# Altium PCB PCB robot V3.2.PCBDOC (part 1 of 3)
Units mil, origin at the board's own origin, x right, y up, seen from the top; angles counter-clockwise.
Board outline 11800 x 7870 mil, 2 copper layers (Top Layer, Bottom Layer); 128 components, 117 nets, 529 pads, 283 vias.
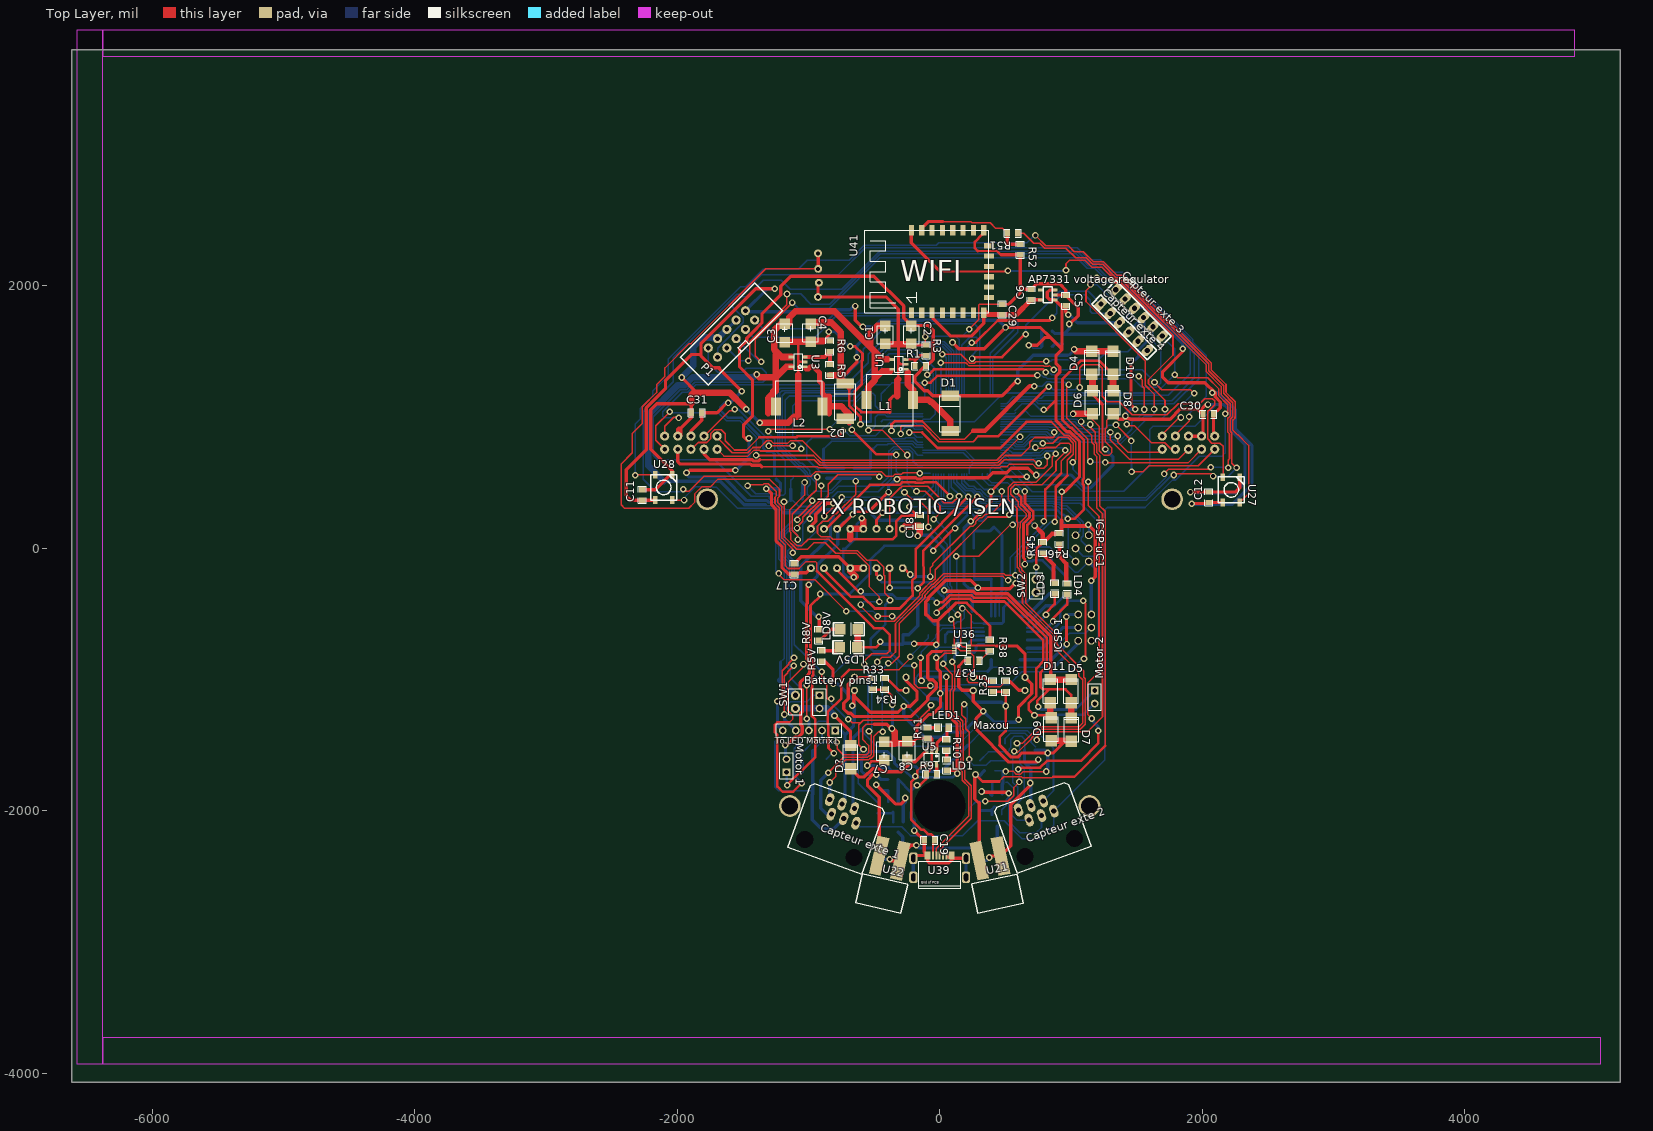
[diagram p0: Top Layer view]
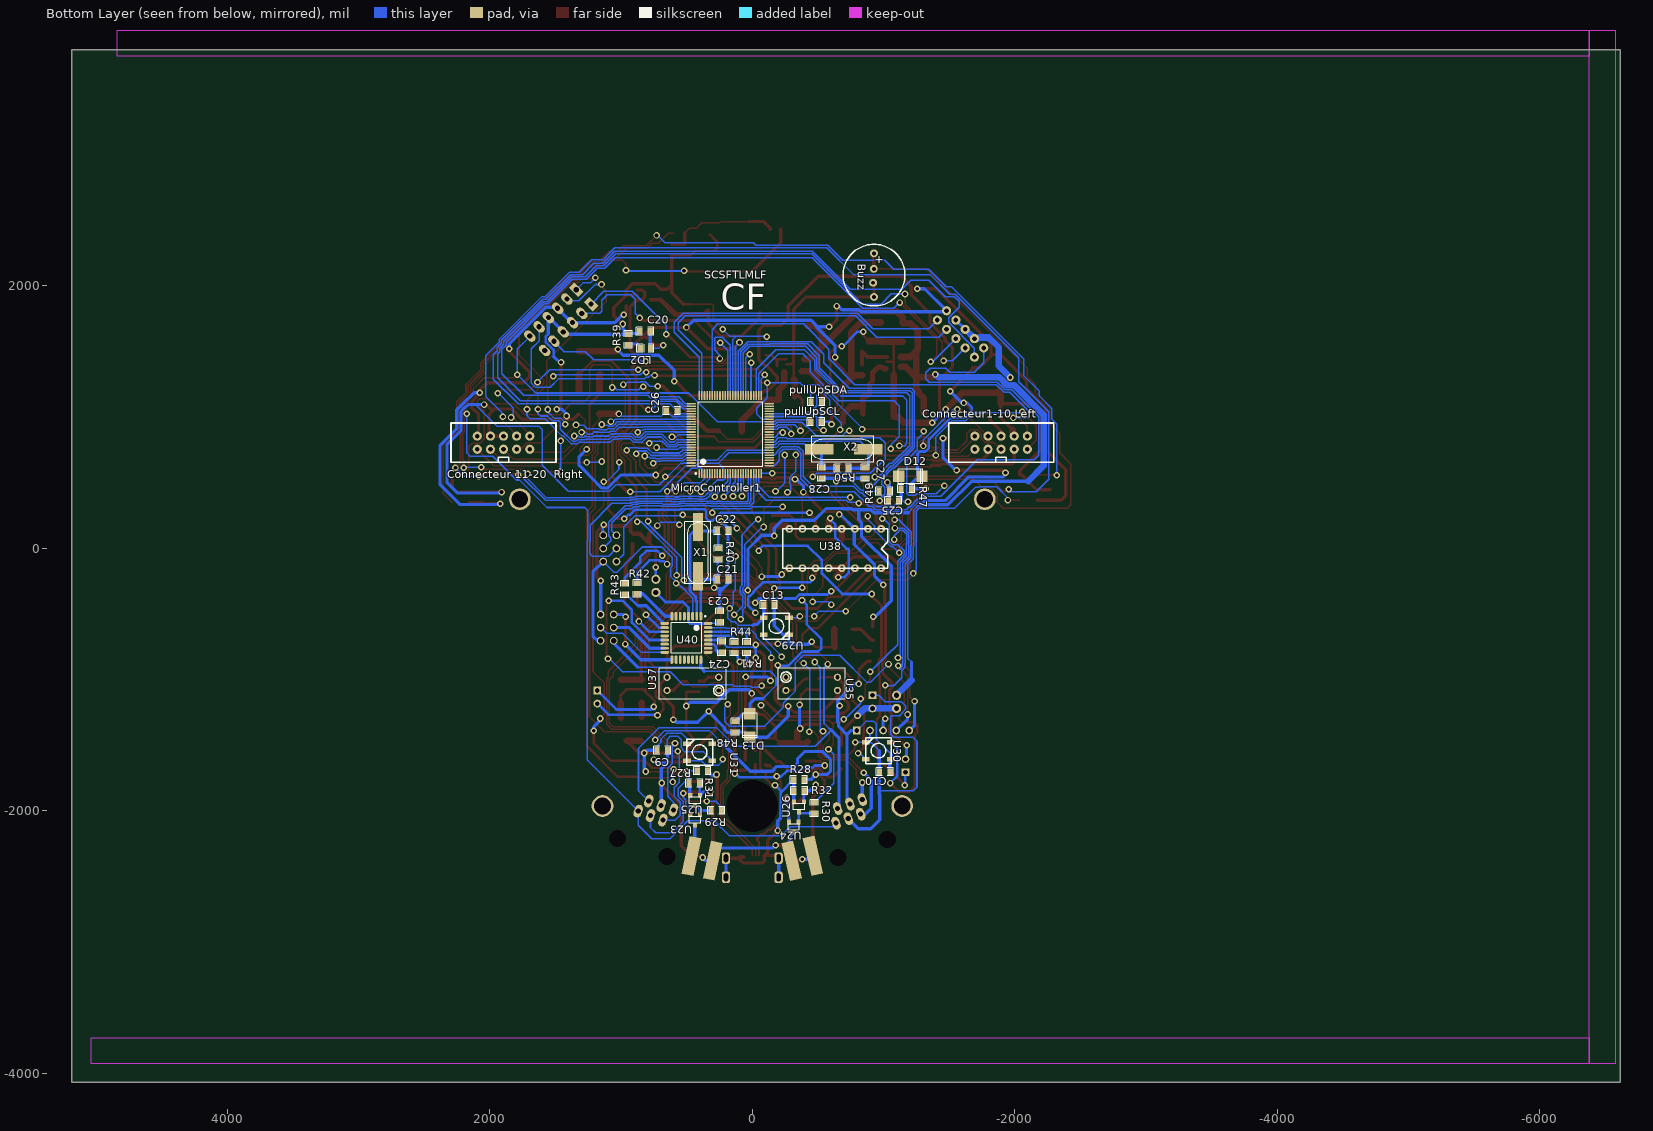
[diagram p1: Bottom Layer view, seen from below]

## Layer stack, top to bottom
Top Solder: solder mask 0.4, Solder Resist, Dk 3.5
Top Layer: signal copper 1.4
Dielectric1: dielectric 12.6, FR-4, Dk 4.8
Bottom Layer: signal copper 1.4
Bottom Solder: solder mask 0.4, Solder Resist, Dk 3.5

## Board outline
-6614.06,-4070.98 5185.94,-4070.98 5185.94,3799.02 -6614.06,3799.02

## Design rules (kind name [scope] priority, off if disabled: settings)
Clearance Clearance_bottom_polygon [OnLayer('Bottom Layer') Or OnLayer('Multi-Layer') vs OnLayer('Bottom Layer')  And  InPoly] p1: gap=20
Clearance Clearance_top_polygon [OnLayer('Top Layer')  Or OnLayer('Multi-Layer') vs OnLayer('Top Layer') And InPoly] p2: gap=20
Clearance Clearance_bottom [OnLayer('Bottom Layer') Or OnLayer('Multi-Layer') vs OnLayer('Bottom Layer')  And Not InPoly] p3: gap=7.48
Clearance Clearance_top [OnLayer('Top Layer')  Or OnLayer('Multi-Layer') vs OnLayer('Top Layer') And Not InPoly] p4: gap=7.56
Clearance Clearance_pad_to_pad [OnLayer('Multi-Layer') vs OnLayer('Multi-Layer')] p5: gap=10
ComponentClearance ComponentClearance_bottom [OnLayer('Bottom Overlay') vs OnLayer('Bottom Overlay')] p1: gap=0 collisioncheckmode=3 verticalgap=10 showdistances=FALSE
ComponentClearance ComponentClearance_top [OnLayer('Top Overlay') vs OnLayer('Top Overlay')] p2: gap=0 collisioncheckmode=3 verticalgap=10 showdistances=FALSE
DiffPairsRouting [All] p1: maxlimit=10 minlimit=3.94 mostfreqgap=10 toplayer_minwidth=15 toplayer_maxwidth=15 toplayer_prefwidth=15 bottomlayer_minwidth=15 bottomlayer_maxwidth=15 bottomlayer_prefwidth=15 maxuncoupledlength=500
FabricationTestPointUsage TestPointUsage [All] p1: valid=0 allowmultiple=FALSE
FabricationTestpoint Testpoint [All] p1: side=3 testpointundercomponent=TRUE minsize=40 maxsize=100 preferedsize=60 minholesize=0 maxholesize=40 preferedholesize=32 testpointgrid=1 allowsidetop=TRUE allowsidebottom=TRUE usegrid=TRUE gridtolerance=0.01
HoleSize [All] p1: absolutevalues=TRUE maxlimit=1000 minlimit=16 maxpercent=80.000 minpercent=20.000
MinimumAnnularRing [PadXSize_AllLayers = PadYSize_AllLayers] p1: minimumring=8
PermittedLayers [All] p1: toplayerpermitted=TRUE bottomlayerpermitted=TRUE
PolygonConnect [All] p1: connectstyle=Relief reliefconductorwidth=24 reliefentries=4 polygonreliefangle="90 Angle" airgapwidth=10
RoutingVias [All] p1: holewidth=16 width=32 viastyle="Through Hole" minholewidth=15.75 minwidth=31.5 maxholewidth=23.62 maxwidth=393.7
SMDToPlane [All] p1: distance=0
SolderMaskExpansion [All] p1: expansion=4
ViasUnderSMD [All] p1: allowed=FALSE
Width Width_botom_top [OnLayer('Bottom Layer') or OnLayer('Top Layer')] p1: maxlimit=10000 minlimit=10 preferedwidth=32 minimp=50.000000 maximp=50.000000 favimp=50.000000
24 further rules are at their usual default settings.

## Classes and differential pairs
component class "Wi fi connector": C29 R51 R52 U41
component class CarteTxMoteur: C17 C18 D4 D5 D6 D7 D8 D9 D10 D11 "Motor 1" "Motor 2" R33 R34 R35 R36 R37 R38 U35 U36 U37 U38
component class "Schema chargeur USB projet robot": C7 C8 LD1 LED1 R9 R10 R11 U5
component class "Alim sch projet robot": "AP7331 voltage regulator" "Battery pins1" C1 C2 C3 C4 C5 C6 D1 D2 D? L1 L2 LD5V LD8V R1 R3 R5 R5V R6 R8V "REG 5V" "REG 8V" SW1 U1 U3
component class "CarteTxCapteurDistance 2": Analog C9 C10 C11 C12 C13 Digital infrared1 infrared2 infrared3 infrared4 infrared5 infrared6 "Infrared 1" LedRgbWs2812b1 LedRgbWs2812b2 LedRgbWs2812b3 LedRgbWs2812b4 LedRgbWs2812b5 LedRgbWs2812b6 LedRgbWs2812b7 LedRgbWs2812b8 LedRgbWs2812b9 LedRgbWs2812b10 Q1 Q2 Q3 Q4 Q5 Q6 Q7 Q8 Q9 Q10 Q11 R27 R28 R29 R30 R31 R32 U21 U22 U23 U24 U25 U26 U27 U28 U29 U30 U31
component class "IA Core": C19 C20 C21 C22 C23 C24 C25 C26 C27 C28 D12 D13 "ICSP 1" "ICSP uC1" LD2 LD3 LD4 MicroController1 pullUpSCL pullUpSDA R39 R40 R41 R42 R43 R44 R45 R46 R47 R48 R49 R50 SW2 U39 U40 X1 X2
component class "LED Matrix connector": "To LED Matrix1"
component class "Sound Connector": Buzz
component class TXRobot-Boutons: ButtonCo1 P1
component class "Line driver connector": C30 C31 Connecteur1-10 "Connecteur1-10 Left" "Connecteur 11-20  Right"
component class "MKbloc Connector": "Capteur exte 1" "Capteur exte 2" "Capteur exte 3" "Capteur exte 4" RJ12-2

## Components (designator, comment, footprint, x,y, rotation, side; value= is the part's Value field where it differs from the comment)
"AP7331 voltage regulator" "AP7331" AP7331 822.85,1930.96 r90 top
"Battery pins1" "Header 2" HDR1X2 -915.57,-1120.49 r270 top
Buzz "BuzzerChinois" BuzzerChinois -927.22,2082.09 r270 bottom
C1 "CAP_POL" 293D/B -414.49,1697.32 r270 top
C2 "CAP_POL" 293D/B -215.69,1697.62 r270 top
C3 "CAP_POL" 293D/B -1180.41,1709.86 r270 top
C4 "CAP_POL" 293D/B -984.25,1712.6 r270 top
C5 "CAP" 0805 960.59,1847.97 r90 top
C6 "CAP" 0805 698.31,1973.76 r270 top
C7 "CAP_POL" 293D/B -421.57,-1614.27 r90 top
C8 "CAP_POL" 293D/B -246.52,-1611.71 r90 top
C9 "CAP" 0805 646.95,-1539.17 r0 bottom
C10 "CAP" 0805 -1048.52,-1703.03 r0 bottom
C11 "CAP" 0805 -2266.54,366.93 r90 top
C12 "CAP" 0805 2050.39,348.62 r90 top
C13 "CAP" 0805 -86.5,-430.18 r180 bottom
C17 "CAP" 0805 -1108.27,-117.62 r270 top
C18 "CAP" 0805 -150.79,170.08 r90 top
C19 "CAP" 0805 -118.11,-2224.41 r0 top
C20 "CAP" 0805 777.99,1655.63 r0 bottom
C21 "CAP" 0805 264.54,-235.55 r180 bottom
C22 "CAP" 0805 264.54,132.33 r180 bottom
C23 "CAP" 0805 247.24,-479.93 r270 bottom
C24 "CAP" 0805 232.87,-711.84 r270 bottom
C25 "CAP" 0805 -1115.59,364.15 r0 bottom
C26 "CAP" 0805 573.22,1048.08 r0 bottom
C27 "CAP" 0805 -862,614.35 r270 bottom
C28 "CAP" 0805 -527.69,614.35 r270 bottom
C29 "CAP" 0805 476.68,1781.06 r90 top
C30 "CAP" 0805 2086.08,1020.43 r180 top
C31 "CAP" 0805 -1812.59,1033.48 r180 top
"Capteur exte 1" "RJ12_1" RJ12_Femelle_FCI -840.6,-2286.64 r340 top
"Capteur exte 2" "RJ12_FCI_Femelle" RJ12_Femelle_FCI 837.82,-2280.29 r20 top
"Capteur exte 3" "headers6" Headers6 1518.86,1794.15 r45 top
"Capteur exte 4" "headers6" Headers6 1405.57,1684.59 r45 top
"Connecteur1-10 Left" "comment" HE10-10V -1696.06,755.12 r90 bottom locked
"Connecteur 11-20  Right" "comment" HE10-10V 2096.06,755.12 r90 bottom locked
D1 "SS32" "Schottly Diode SS32 footprint" 79,1162.38 r0 top
D2 "SS32" "Schottly Diode SS32 footprint" -719.69,1255.63 r0 top
D4 "DiodeRedresseuse" "Diode MULTICOMP SS16" 1160.24,1414.57 r90 top
D5 "DiodeRedresseuse" "Diode MULTICOMP SS16" 1001.57,-1088.78 r90 top
D6 "DiodeRedresseuse" "Diode MULTICOMP SS16" 1164.57,1112.99 r90 top
D7 "DiodeRedresseuse" "Diode MULTICOMP SS16" 1004.13,-1381.5 r90 top
D8 "DiodeRedresseuse" "Diode MULTICOMP SS16" 1322.05,1112.99 r90 top
D9 "DiodeRedresseuse" "Diode MULTICOMP SS16" 850,-1378.54 r90 top
D10 "DiodeRedresseuse" "Diode MULTICOMP SS16" 1320.67,1413.98 r90 top
D11 "DiodeRedresseuse" "Diode MULTICOMP SS16" 844.09,-1088.78 r90 top
D12 "DiodeRedresseuse" "Diode MULTICOMP SS16" -1205.12,549.04 r180 bottom
D13 "DiodeRedresseuse" "Diode MULTICOMP SS16" 18.15,-1350.62 r270 bottom
D? "DiodeRedresseuse" "Diode MULTICOMP SS16" -679.41,-1591.57 r90 top
"ICSP 1" "ISCP Arduino" "Prog Arduino" 1055.96,-504.18 r0 top
"ICSP uC1" "ISCP Arduino" "Prog Arduino" 1035.71,99.17 r0 top
L1 "IND" 1050 -557.19,1130.98 r90 top
L2 "IND" 1050 -1247.97,1081.87 r90 top
LD1 "comment" LED0805 54.13,-1611.75 r270 top
LD2 "Yellow" LED0805 854.72,1526.18 r180 bottom
LD3 "Yellow" LED0805 876.2,-346.37 r90 top
LD4 "Yellow" LED0805 970.83,-350.4 r90 top
LD5V "comment" LED1206 -628.27,-753.94 r180 top
LD8V "comment" LED1206 -624.07,-615.81 r180 top
LED1 "comment" LED0805 -14.53,-1365.92 r0 top
MicroController1 "ATmega2560-16AU" 100A_N 167.53,867 r90 bottom
"Motor 1" "Header 2" HDR1X2 -1167.32,-1706.69 r90 top
"Motor 2" "Header 2" HDR1X2 1181.14,-1083.23 r270 top
P1 "comment" HE10-10V -1692.91,1456.69 r135 top
pullUpSCL "RES" 0805 -525.26,965.59 r0 bottom
pullUpSDA "RES" 0805 -527.91,1116.59 r0 bottom
R1 "RES" 0805 -188.31,1389.8 r0 top
R3 "RES" 0805 -102.52,1550.24 r270 top
R5 "RES" 0805 -836.95,1400.18 r270 top
R5V "RES" 0805 -900.35,-779.74 r270 top
R6 "RES" 0805 -838.92,1579.9 r270 top
R8V "RES" 0805 -921.54,-700.43 r90 top
R9 "RES" 0805 -23.39,-1720.27 r180 top
R10 "RES" 0805 51.91,-1538.67 r90 top
R11 "RES" 0805 -94.26,-1368.13 r270 top
R27 "RES" 0805 340.47,-1695.65 r0 bottom
R28 "RES" 0805 -395.21,-1762.43 r0 bottom
R29 "RES" 0805 234.88,-1998.01 r0 bottom
R30 "RES" 0805 -472.09,-1939.98 r270 bottom
R31 "RES" 0805 482.98,-1789.48 r180 bottom
R32 "RES" 0805 -316.52,-1848.45 r180 bottom
R33 "RES" 0805 -508.07,-1073.03 r90 top
R34 "RES" 0805 -417.66,-1072.46 r90 top
R35 "RES" 0805 404.96,-1093.11 r90 top
R36 "RES" 0805 503.29,-1093.11 r90 top
R37 "RES" 0805 299.45,-855.06 r180 top
R38 "RES" 0805 383.39,-699.65 r270 top
R39 "RES" 0805 944.68,1551.38 r90 bottom
R40 "RES" 0805 259.66,-80.85 r90 bottom
R41 "RES" 0805 43.3,-714.94 r270 bottom
R42 "RES" 0805 876.2,-346.37 r90 bottom
R43 "RES" 0805 970.83,-350.4 r90 bottom
R44 "RES" 0805 138.88,-795.02 r90 bottom
R45 "RES" 0805 785.45,-36.52 r90 top
R46 "RES" 0805 912.22,33.39 r90 top
R47 "RES" 0805 -1134.15,452.67 r180 bottom
R48 "RES" 0805 128.67,-1320.46 r270 bottom
R49 "RES" 0805 -965.22,435.32 r180 bottom
R50 "RES" 0805 -650.21,609.35 r180 bottom
R51 "RES" 0805 595.24,2402.29 r180 top
R52 "RES" 0805 614.21,2316.93 r270 top
SW1 "allumage" JMP2-100 -1099.49,-1219.94 r90 top
SW2 "allumage" JMP2-100 735.04,-336.02 r90 top
"To LED Matrix1" "Header 5" HDR1X5 -796.69,-1388.15 r180 top
U1 "LM2731" "LM2731 footprint" -258.01,1365.33 r270 top
U3 "LM2731" "LM2731 footprint" -1025.33,1383.25 r270 top
U5 "MCP73831" MCP73831 -23.2,-1537.91 r180 top
U21 "infrared" Infrared 382.68,-2362.2 r192 top
U22 "infrared" Infrared -380.75,-2362.2 r167 top
U23 "Transistors" BC817-40 436,-2070.85 r180 bottom
U24 "Transistors" BC817-40 -316.03,-2125.5 r180 bottom
U25 "Transistors" BC817-40 435.6,-1922.06 r180 bottom
U26 "Transistors" BC817-40 -356.12,-1970.45 r180 bottom
U27 "LedRgbWs2812b" LedRgbWs2812b 2222.44,445.47 r90 top
U28 "LedRgbWs2812b" LedRgbWs2812b -2103.35,464.17 r90 top
U29 "LedRgbWs2812b" LedRgbWs2812b -183.35,-593.37 r180 bottom
U30 "LedRgbWs2812b" LedRgbWs2812b -961.48,-1541.93 r0 bottom
U31 "LedRgbWs2812b" LedRgbWs2812b 401,-1553.6 r0 bottom
U35 "ITR9608" "ITR9608 footprint" -452.76,-1032.68 r180 bottom locked
U36 "MCP6002" MCP6002 109.45,-740.55 r0 top
U37 "ITR9608" "ITR9608 footprint" 452.76,-1032.68 r0 bottom locked
U38 "L293NE" L293NE -981.89,-151.38 r270 bottom
U39 "USB microB" "USB micro B connector" 0,-2471.73 r0 top
U40 "ATmega16U2-AU" 32A_N 502.28,-682.86 r270 bottom
U41 "ESP8266MOD" "ESP8266MOD Footprint" -215.02,1794.49 r90 top
X1 "16MHz" HC-49S-SMD 413.75,-211.8 r90 bottom
X2 "16MHz" HC-49S-SMD -510.75,754.25 r180 bottom

## Footprints (in the part's own frame and the unit in brackets; to place one, negate y for a bottom-side part, rotate by r counter-clockwise, add the part's x,y. Pads: shape width x height; smd on the part's side, far side on the other; paste and mask are expansions set on the pad)
32A_N [mm] "Thin QFP, 32-Leads, Body 7x7mm, Pitch 0.8mm, IPC Medium Density"
  oval 1.65x0.55 smd: 1(-4.2,2.8) 2(-4.2,2) 3(-4.2,1.2) 4(-4.2,0.4) 5(-4.2,-0.4) 6(-4.2,-1.2) 7(-4.2,-2) 8(-4.2,-2.8) 17(4.2,-2.8) 18(4.2,-2) 19(4.2,-1.2) 20(4.2,-0.4) 21(4.2,0.4) 22(4.2,1.2) 23(4.2,2) 24(4.2,2.8)
  oval 0.55x1.65 smd: 9(-2.8,-4.2) 10(-2,-4.2) 11(-1.2,-4.2) 12(-0.4,-4.2) 13(0.4,-4.2) 14(1.2,-4.2) 15(2,-4.2) 16(2.8,-4.2) 25(2.8,4.2) 26(2,4.2) 27(1.2,4.2) 28(0.4,4.2) 29(-0.4,4.2) 30(-1.2,4.2) 31(-2,4.2) 32(-2.8,4.2)
  silkscreen extent -4.32,-2.95 2.95,3.75, body extent -3.5,-3.5 3.5,3.5, height 1.2
100A_N [mm] "Thin QFP, 100-Leads, Body 14x14mm, Pitch 0.5mm, IPC Medium Density"
  oval 1.8x0.3 smd: 1(-7.55,6) 2(-7.55,5.5) 3(-7.55,5) 4(-7.55,4.5) 5(-7.55,4) 6(-7.55,3.5) 7(-7.55,3) 8(-7.55,2.5) 9(-7.55,2) 10(-7.55,1.5) 11(-7.55,1) 12(-7.55,0.5) 13(-7.55,0) 14(-7.55,-0.5) 15(-7.55,-1) 16(-7.55,-1.5) 17(-7.55,-2) 18(-7.55,-2.5) 19(-7.55,-3) 20(-7.55,-3.5) 21(-7.55,-4) 22(-7.55,-4.5) 23(-7.55,-5) 24(-7.55,-5.5) 25(-7.55,-6) 51(7.55,-6) 52(7.55,-5.5) 53(7.55,-5) 54(7.55,-4.5) 55(7.55,-4) 56(7.55,-3.5) 57(7.55,-3) 58(7.55,-2.5) 59(7.55,-2) 60(7.55,-1.5) 61(7.55,-1) 62(7.55,-0.5) 63(7.55,0) 64(7.55,0.5) 65(7.55,1) 66(7.55,1.5) 67(7.55,2) 68(7.55,2.5) 69(7.55,3) 70(7.55,3.5) 71(7.55,4) 72(7.55,4.5) 73(7.55,5) 74(7.55,5.5) 75(7.55,6)
  oval 0.3x1.8 smd: 26(-6,-7.55) 27(-5.5,-7.55) 28(-5,-7.55) 29(-4.5,-7.55) 30(-4,-7.55) 31(-3.5,-7.55) 32(-3,-7.55) 33(-2.5,-7.55) 34(-2,-7.55) 35(-1.5,-7.55) 36(-1,-7.55) 37(-0.5,-7.55) 38(0,-7.55) 39(0.5,-7.55) 40(1,-7.55) 41(1.5,-7.55) 42(2,-7.55) 43(2.5,-7.55) 44(3,-7.55) 45(3.5,-7.55) 46(4,-7.55) 47(4.5,-7.55) 48(5,-7.55) 49(5.5,-7.55) 50(6,-7.55) 76(6,7.55) 77(5.5,7.55) 78(5,7.55) 79(4.5,7.55) 80(4,7.55) 81(3.5,7.55) 82(3,7.55) 83(2.5,7.55) 84(2,7.55) 85(1.5,7.55) 86(1,7.55) 87(0.5,7.55) 88(0,7.55) 89(-0.5,7.55) 90(-1,7.55) 91(-1.5,7.55) 92(-2,7.55) 93(-2.5,7.55) 94(-3,7.55) 95(-3.5,7.55) 96(-4,7.55) 97(-4.5,7.55) 98(-5,7.55) 99(-5.5,7.55) 100(-6,7.55)
  silkscreen extent -7.67,-6.25 6.25,6.83, body extent -7,-7 7,7, height 1.2
293D/B [mil]
  rect 80x80 smd: 1(0,0) 2(140,0)
  silkscreen extent 0,-60 140,60
0805 [mil]
  rect 40x50 smd: 1(0,0) 2(80,0)
  silkscreen extent -25,-30 105,30
1050 [mm]
  rect 3.5x2 smd paste+0 mask+1: 1(0,0) 2(0,-9)
  silkscreen extent -5,-9 5,0
AP7331 [mm]
  rect 0.6x1.1 smd: 1(-0.95,-1.35) 2(0,-1.35) 3(0.95,-1.35) 4(0.95,1.35) 5(-0.95,1.35)
  silkscreen extent -1.55,-0.85 1.55,0.85
BC817-40 [mm]
  rect 0.8x0.9 smd: 1(0.95,1) 2(-0.95,1) 3(0,-1)
  silkscreen extent -1.1,-0.6 1.1,0.6
BuzzerChinois [mil]
  round 60 hole 31.5: 0(-166.14,0)
  round 60 hole 30: 1(166.14,0)
  silkscreen extent -235,-235 235,235
"Diode MULTICOMP SS16" [mm]
  rect 2.2x2.21 smd: 1(-2.25,0) 2(2.25,0)
  silkscreen extent -2.37,-1.4 2.37,1.4
"ESP8266MOD Footprint" [mm]
  rect 2x1 smd paste+0 mask+0.05: 1(0,0) 2(0,-2) 3(0,-4) 4(0,-6) 5(0,-8) 6(0,-10) 7(0,-12) 8(0,-14) 15(16,-14) 16(16,-12) 17(16,-10) 18(16,-8) 19(16,-6) 20(16,-4) 21(16,-2) 22(16,0)
  rect 1x2 smd paste+0 mask+0.05: 9(3,-15) 10(5,-15) 11(7,-15) 12(9,-15) 13(11,-15) 14(13,-15)
  silkscreen extent 0,-15 16,9
HC-49S-SMD [mm] "SMD quartz crystal"
  rect 5.5x2 smd: 1(0,0) 2(9.5,0)
  silkscreen extent -1.5,-2.48 10.5,2.52
HDR1X2 [mm] "Connector; Header; 2 Position"
  rect 1.5x1.5 hole 0.9: 1(0,0)
  round 1.5 hole 0.9: 2(2.54,0)
  silkscreen extent -1.27,-1.27 3.81,1.27
HDR1X5 [mm] "Connector; Header; 5 Position"
  rect 1.5x1.5 hole 0.9: 1(0,0)
  round 1.5 hole 0.9: 2(2.54,0) 3(5.08,0) 4(7.62,0) 5(10.16,0)
  silkscreen extent -1.27,-1.27 11.43,1.27
HE10-10V [mil]
  round 70 hole 36: 1(0,0) 2(100,0) 3(0,-100) 4(100,-100) 5(0,-200) 6(100,-200) 7(0,-300) 8(100,-300) 9(0,-400) 10(100,-400)
  silkscreen extent -100,-600 200,200
Headers6 [mil]
  rect 99.37x60 hole 39.37: 1(0,250)
  oval 99.37x60 hole 39.37: 2(0,150) 3(0,50) 4(0,-50) 5(0,-150) 6(0,-250)
  silkscreen extent -50,-300 50,300
Infrared [mm]
  rect 2.3x7.5 smd far side: gndEmitter(-2.1,0) VCC(2.1,0)
  rect 2.3x7.5 smd: gndReceiver(2.1,0) VCC(-2.1,0)
  silkscreen extent -4.5,4.1 4.5,9.9
"ITR9608 footprint" [mm]
  round 1.4 hole 0.8 paste+0 mask+0.05: 1(-5,1.27) 2(-5,-1.27) 3(5,-1.27) 4(5,1.27)
  silkscreen extent -6.5,-3 6.5,3
JMP2-100 [mil]
  round 70 hole 40: 1(0,0) 2(100,0)
  silkscreen extent -50,-50 150,50
L293NE [mil]
  round 60 hole 30: 1(-300,0) 2(-300,-100) 3(-300,-200) 4(-300,-300) 5(-300,-400) 6(-300,-500) 7(-300,-600) 8(-300,-700) 9(0,0) 10(0,-100) 11(0,-200) 12(0,-300) 13(0,-400) 14(0,-500) 15(0,-600) 16(0,-700)
  silkscreen extent -300,-750 0,50
LED0805 [mil]
  rect 40x50 smd: A(80,0) K(0,0)
  silkscreen extent -25,-30 105,30
LED1206 [mil]
  rect 80x80 smd: A(135,0) K(0,0)
  silkscreen extent -50,-50 185,50
LedRgbWs2812b [mm]
  rect 1.5x0.9 smd: din(2.45,1.65) dout(-2.45,-1.65) GND(2.45,-1.65) VCC(-2.45,1.65)
  silkscreen extent -2.5,-2.5 2.5,2.5
"LM2731 footprint" [mm]
  rect 0.55x1 smd paste+0 mask+0.05: 1(0,0) 2(-0.95,0) 3(-1.9,0) 4(-1.9,-2.7) 5(0,-2.7)
  silkscreen extent -2.54,-2.16 0.64,-0.51
MCP6002 [mm]
  rect 0.75x0.3 smd paste+0 mask+0.05: 1(0,0) 2(0,-0.5) 3(0,-1) 4(0,-1.5) 5(2.9,-1.5) 6(2.9,-1) 7(2.9,-0.5) 8(2.9,0)
  silkscreen extent 0.4,-1.9 2.5,0.5
MCP73831 [mm]
  rect 0.6x1.1 smd paste+0 mask+0.05: 1(0,0) 2(0.95,0) 3(1.9,0) 4(1.9,2.8) 5(0,2.8)
  silkscreen extent -0.51,0.63 2.41,2.16
"Prog Arduino" [mm]
  round 1.5 hole 1 paste+0 mask+0.05: 1(0,0) 2(2.54,0) 3(0,-2.54) 4(2.54,-2.54) 5(0,-5.08) 6(2.54,-5.08)
RJ12_Femelle_FCI [mm]
  oval 1.524x2.524 hole 1: 1(-3.17,8.89) 2(-1.91,6.35) 3(-0.63,8.89) 4(0.63,6.35) 5(1.91,8.89) 6(3.17,6.35)
  round 0 hole 3.3: ""(-5.08,0) ""(5.08,0)
  silkscreen extent -7.62,-2.54 7.62,10.8
"Schottly Diode SS32 footprint" [mm]
  rect 3.39x1.96 smd paste+0 mask+0.05: 1(0,0) 2(0,-6.81)
  silkscreen extent -2,-7 2,0
"USB micro B connector" [mm]
  rect 0.4x1.5 smd paste+0 mask+0.05: 1(-1.3,3.302) 2(-0.65,3.302) 3(0,3.302) 4(0.65,3.302) 5(1.3,3.302)
  rrect50% 1.6x2.2 hole 0.8 slot 1.5 at 90 deg paste+0 mask+0.05: 6(-5.1,2.794) 7(-5.1,-0.906) 8(5.1,-0.906) 9(5.1,2.794)
  rect 1.15x1.5 smd paste+0 mask+0.05: 10(-2.325,3.302) 11(2.325,3.302)
  silkscreen extent -4.08,-3.05 4.04,2.16

## Part data
"Battery pins1" "Motor 1" "Motor 2": "Header, 2-Pin"
C1 C2 C3 C4 C7 C8: "capacité polarisée"
C5 C6 C9 C10 C11 C12 C13 C17 C18 C19 C20 C21 C22 C23 C24 C25 C26 C27 C28 C29 C30 C31: "capacité non polarisée"
"Capteur exte 1": library part RJ12_FCI_Femelle
"Connecteur1-10 Left" "Connecteur 11-20  Right" P1: library part HE10-10, "10-pin connector"
D1 D2: "Schottky Diode 20V 3A"
"ICSP 1" "ICSP uC1": "Programmation Port For Arduino"
L1 L2: library part "Shielded inductor", "Shielded Inductor 1050"
LD1 LD2 LD3 LD4 LD5V LD8V LED1: library part LED, "LED 5mm/3mm/CMS"
MicroController1: "8-bit AVR Microcontroller, 4.5-5.5V, 256KB Flash, 4KB EEPROM, 8KB SRAM, 86 GPIO pins, 100-pin TQFP, Industrial Grade (-40°C to 85°C), Pb-Free"
pullUpSCL pullUpSDA R1 R3 R5 R5V R6 R8V R9 R10 R11 R27 R28 R29 R30 R31 R32 R33 R34 R35 R36 R37 R38 R39 R40 R41 R42 R43 R44 R45 R46 R47 R48 R49 R50 R51 R52: "resistance"
SW1 SW2: library part JUMPER2, "cavalier 1 position"
"To LED Matrix1": "Header, 5-Pin"
U1 U3: "Boost switch regulator DCDC"
U5: "Voltage regulator for Li-po or li-ion battery, USB compatible"
U21 U22: library part RPR-359F
U23 U24 U25 U26: "NPN transistor"
U35 U37: "Intersection sensor"
U36: "Double Operational Amplifier"
U39: "Usb female connector SMD micro B"
U40: "8-bit AVR Microcontroller, 2.7-5.5V, 16KB Flash, 512 Bytes EEPROM, 512 Bytes SRAM, 32-pin TQFP, Industrial Grade (-40°C to 85°C)"
U41: "Wi fi ESP"
X1 X2: library part XTAL, "Quartz"

## Free pads (board coordinates)
  round 60 hole 30: 0(-925.79,2130.04) 1(-920.83,2023.82)
  round 165.35 hole 125.98: ""(-1771.65,374.02) ""(-1141.73,-1963.78) ""(1141.73,-1963.78) ""(1771.65,374.02)
  round 0 hole 393.7: ""(0,-1963.78)

## Via types
v1: diameter 50, hole 28, Top Layer to Bottom Layer, 283 vias

## Nets (pads, with @x,y where several pads share a name; then routed paths per layer and width w, separated by ;. In a path a pad name is that pad's centre, name@x,y a point inside that pad or via, vN(x,y) a via of type N, cw(c..) or ccw(c..) an arc to the next point about the centre after c; other vN are vias at no path point)
BATTERY: C1.1 C3.1 L1.1 L2.1 SW1.2 U1.4 U1.5 U3.4 U3.5 | length 6977.4
  Top Layer w50: v1(-1394.98,1325.04) -1373.07,1303.13 -1247.97,1303.13 ; -1307.3,1028.58 -1307.3,1144.76 -1267.6,1184.47 -1267.6,1196.06 -1247.97,1196.06 -1247.97,1303.13 ; U3.5@-1131.63,1383.25 -1167.85,1383.25 -1247.97,1303.13 ; U3.4@-1131.63,1458.05 -1204.07,1458.05 -1235.47,1489.45 ; L1.1@-545.94,1142.22 -545.94,1228.09 -494.43,1279.61 -494.43,1291.91 ; C1.1@-418.96,1695.85 -474.69,1695.85 -529.51,1641.02 -529.51,1534.47 -494.43,1499.39 ; -395.61,1440.14 -435.18,1440.14 -494.43,1499.39 ; -376.32,1350.77 -377.89,1349.19 -437.15,1349.19 -494.43,1291.91 ; -1247.97,1303.13 -1247.97,1476.95 -1235.47,1489.45 ; -1235.47,1489.45 -1262.34,1516.32 -1262.34,1659.23 -1206.24,1715.33 -1146.2,1715.33 -1146.2,1759.82 -1099.23,1806.79 -801.83,1806.79 -494.43,1499.39 ; -494.43,1291.91 -494.43,1499.39
  Bottom Layer w12: -1329.04,331.52 -1321.57,324.05 -1261.34,324.05 -1229.27,291.98 -1229.27,283.39 -1229.1,283.22 -1229.1,11.77 -1227.61,10.29 -1227.61,-79.43 -1183.6,-123.44 -1183.6,-837.07 -1213.43,-866.89
  Bottom Layer w25: -2102.89,511.44 -1671.02,511.44 -1491.1,331.52 -1329.04,331.52 ; -1213.43,-1006 -1213.43,-866.89
  Bottom Layer w50: -2102.89,511.44 -2220.16,628.7 -2220.16,1018.64 -1994.47,1244.33 -1941.91,1244.33 -1883.09,1303.15 -1416.89,1303.15 v1@-1399.98,1320.06 ; -1213.43,-1006 SW1.2@-1099.49,-1119.94
"BATTERY PIN +": "Battery pins1.2" D?.2 SW1.1 | length 601.2
  Top Layer w25: v1@-803.35,-1274.92 v1(-801.56,-1274.92) -679.41,-1397.07 D?.2@-679.41,-1502.99
  Bottom Layer w50: SW1.1@-1099.49,-1219.94 -916.12,-1219.94 -915.57,-1220.49 -855.98,-1220.49 v1(-801.56,-1274.92)
D+: R44.1 U39.3 | length 1736.2
  Top Layer w10: U39.3@0,-2341.73 0,-2297.35 241.39,-2055.96 241.39,-1810.62 190.92,-1760.14 190.92,-1692.44 178.42,-1679.94 178.42,-1381.48 175.86,-1378.92 175.86,-1319.1 102.64,-1245.88 102.64,-1088.85 116.16,-1075.32 116.16,-896.59 95.57,-876 v1(95.57,-864.21)
  Bottom Layer w20: v1(95.57,-864.21) 112.07,-847.72 112.07,-821.83 R44.1@138.88,-795.02
D-: R41.2 U39.2 | length 1706.1
  Top Layer w12: U39.2@-25.59,-2341.73 -25.59,-2287.55 157.3,-2104.65 157.3,-2104.04 222.83,-2038.51 222.83,-1818.31 172.36,-1767.83 172.36,-1700.13 159.86,-1687.63 159.86,-1389.16 157.3,-1386.61 157.3,-1326.79 81.42,-1250.9 81.42,-1083.82 96.16,-1069.08 96.16,-960.89 v1@26.61,-891.34
  Bottom Layer w25: v1(27.2,-880.14) v1@28.39,-881.32 ; 43.3,-852.56 R41.2@43.3,-794.94
DTR: C25.2 R49.2 U40.13 | length 5140.5
  Top Layer w12: v1(-1029.82,502.19) -1029.82,406.24 -1143.22,292.84 -1143.22,129.97 -1136.69,123.44 -1136.69,67.75 -1089.87,20.93 -1050.57,20.93 -1001.42,70.08 -844.96,70.08 -756.52,-18.36 -625.65,-18.36 -553.83,-90.18 -477.46,-90.18 -425.45,-142.19 -425.45,-202.66 -419.1,-209.01 -419.1,-282.93 -419.86,-283.69 -419.86,-338.22 -373.27,-384.82 v1@-373.27,-392.15 ; v1(-193.6,-890.39) -193.6,-1034.41 -165.31,-1062.7 -87.07,-1062.7 v1(-70.65,-1046.28) ; v1(1093.52,-400.67) 1111.28,-418.43 1111.28,-830.53 v1(1099.82,-841.99)
  Bottom Layer w12: v1@-378.84,-396.04 v1(-378.84,-394.57) ; v1@-68.64,-1059.65 6.6,-1059.65 14.08,-1052.17 137.81,-1052.17 149.06,-1040.93 526.48,-1040.93 625.76,-941.64 989.15,-941.64 1088.8,-841.99 v1(1099.82,-841.99)
  Bottom Layer w19.68: v1(-378.84,-394.57) -413.76,-429.49 -413.76,-578.62 -526.65,-691.52 -526.65,-761.69 -501.83,-786.52 -383.19,-786.52 -275.41,-894.29 v1@-189.7,-894.29
  Bottom Layer w20: U40.13@667.63,-698.61 785.11,-698.61 917.4,-566.32 917.4,-469.61 986.34,-400.67 v1(1093.52,-400.67)
  Bottom Layer w25: C25.2@-1046.5,377.48 R49.2@-1046.5,424.33 ; R49.2@-1045.22,435.32 -1045.22,486.79 v1(-1029.82,502.19)
"ENABLE 1": MicroController1.23 U38.1 | length 1252.6
  Top Layer w25: U38.1@-981.89,148.62 -981.89,169.09 -944.47,206.51 -944.47,259.7 -861.24,342.93 v1(-810.43,342.93)
  Bottom Layer w10: v1(-810.43,342.93) -802.93,350.43 -731.56,350.43 -716.63,365.36 -106.09,365.36 -29.32,442.14 MicroController1.23@-29.32,569.75
  Bottom Layer w20: v1@-810.43,335.24 v1(-810.43,342.93)
"ENABLE 2": MicroController1.5 U38.16 | length 1404
  Top Layer w12: v1(-73.17,-215.1) -73.17,-151.22 -54.17,-132.22 -54.17,-118.32 232.64,168.49 253.51,168.49 276.1,191.08 276.1,205.85 303.52,233.27 322.25,233.27 347.26,258.28 388.38,258.28 473.52,343.43 v1(473.52,433.43) ; v1@-71.16,-217.6 v1@-71.16,-215.1
  Top Layer w20: U38.16@-281.89,-151.38 -272.6,-151.38 v1(-224.43,-199.55)
  Bottom Layer w12: MicroController1.5@325.01,543.97 MicroController1.5@325.01,569.75 325.19,569.57 325.19,532.15 375.66,481.68 413.08,481.68 461.34,433.43 v1(473.52,433.43)
  Bottom Layer w20: v1@-222.3,-215.1 v1(-73.17,-215.1)
GND: "AP7331 voltage regulator.2" "Battery pins1.1" "Capteur exte 1.4" "Capteur exte 2.4" "Capteur exte 3.4" "Capteur exte 4.4" "Connecteur1-10 Left.8" "Connecteur 11-20  Right.4" "Connecteur 11-20  Right.6" "ICSP 1.6" "ICSP uC1.6" "To LED Matrix1.2" Buzz.1 C1.2 C2.2 C3.2 C4.2 C5.2 C6.1 C7.2 C8.2 C9.2 C10.2 C11.2 C12.2 C13.2 C17.1 C18.2 C19.1 C20.2 C21.2 C22.2 C23.1 C24.1 C26.2 C27.2 C28.2 C29.2 C30.2 C31.2 D6.1 D7.1 D8.1 D9.1 LD5V.K LD8V.K MicroController1.11 MicroController1.32 MicroController1.62 MicroController1.81 MicroController1.98 MicroController1.99 P1.4 P1.6 P1.8 pad.1 R3.1 R6.1 R9.2 R11.2 R27.2 R28.2 R31.1 R32.1 R33.1 R34.1 R35.1 R36.1 R38.1 R39.2 R49.1 R52.2 U1.2 U3.2 U5.2 U25.2 U26.2 U27.GND U28.GND U29.GND U30.GND U31.GND U36.4 U38.4 U38.5 U38.12 U38.13 U39.5 U39.6 U39.7 U39.8 U39.9 U39.10 U39.11 U40.3 U40.28 U41.15 | length 41494.7
  Top Layer w12: v1@-780.63,-1477.26 -780.63,-1528.44 -735.73,-1573.35 -558.03,-1573.35 -542.27,-1557.59 -542.27,-1502 -584.9,-1459.37 -584.9,-1363.19 -562.09,-1340.37 -500.37,-1340.37 ; -681.89,68.25 -815.47,68.25 -836.86,89.64 -907.18,89.64 -930.98,113.44 -930.98,167.58 -891.33,207.23 -852.97,207.23 -797.57,262.62 -787.39,262.62 -639.86,410.15 v1(-639.86,512.85) ; R3.1@-108.98,1556.99 v1(-108.98,1612.32) ; 4.23,-931.99 -23.46,-904.29 -23.46,-860.69 37.62,-799.61 U36.4@109.45,-799.61 ; v1@222.75,1669.22 296.85,1743.33 296.85,1854.65 303.27,1861.06 C29.2@476.68,1861.06 ; v1(502.8,-1700.45) 562.42,-1700.45 583.71,-1721.75 615.66,-1721.75 635.2,-1702.2 v1@799.09,-1702.2 ; D6.1@1164.57,1024.41 1164.57,980.97 1216.22,929.31 1216.22,743.46 1251.75,707.93 1289.47,707.93 1312.54,731 1312.54,763.66 1262.56,813.64 1262.56,910.46 1272.01,919.9 1272.01,974.37 D8.1@1322.05,1024.41
  Top Layer w16.06: 289.33,2266.36 437.18,2266.36
  Top Layer w20: -1079.27,1323.6 -1079.27,1433.64 ; -1079.27,1575.33 -1079.27,1433.64 ; U3.2@-1025.33,1420.65 -1066.28,1420.65 -1079.27,1433.64 ; -887.34,1579.9 -843.13,1624.11 ; -681.89,68.25 -360.67,68.25 -329.8,99.11 -329.8,206.4 -286.12,250.08 C18.2@-172.62,250.08 ; v1(-681.28,1539.9) -644.59,1539.9 -588.19,1483.5 -588.19,1433.87 -592.87,1429.18 -592.87,1252.29 -648.07,1197.1 -648.07,1088.77 -596.43,1037.13 -380.73,1037.13 ; LD5V.K@-628.27,-753.94 -485.08,-753.94 -442.93,-711.79 v1(-453.07,-711.79) ; R33.1@-503.17,-1079.41 -500.94,-1077.18 R34.1@-414.07,-1077.18 ; R34.1@-417.66,-1072.46 -368.05,-1122.07 -368.05,-1179.31 v1@-357.24,-1190.12 ; -315.49,1288.37 -315.49,1555.85 ; -312.34,1555.85 -312.34,1419.47 -295.61,1402.74 U1.2@-258.01,1402.74 ; v1@-228.46,305.93 C18.2@-172.62,250.08 ; C8.2@-214.14,-1486.8 -175.47,-1448.13 R11.2@-94.26,-1448.13 ; v1(-172.72,-1805.2) -150,-1805.2 -103.39,-1758.58 R9.2@-103.39,-1720.27 -60.6,-1677.49 U5.2@-60.6,-1537.91 ; C18.2@-150.79,250.08 C18.2@-172.62,250.08 ; 120.79,-418.8 124.13,-415.45 205.85,-415.45 383.39,-593 R38.1@383.39,-699.65 ; v1(237.54,207.05) 237.54,200.61 390.96,354.04 v1(390.96,432.68) 503.84,545.55 v1(663.19,545.55) ; 289.33,2266.36 268.6,2287.09 268.6,2335.28 U41.15@324.15,2390.83 ; R35.1@404.96,-1093.11 R36.1@503.29,-1093.11 503.29,-1392.48 456.89,-1438.88 456.89,-1501.36 ; 437.18,2266.36 466.61,2236.93 ; C29.2@476.68,1861.06 526.65,1861.06
  Top Layer w25: C11.2@-2266.54,446.93 -2165.81,446.93 -2052.11,560.63 U28.GND@-2038.39,560.63 -2038.39,590.85 -2203.11,755.57 -2203.11,1056.16 -2157.89,1101.38 -1892.59,1101.38 C31.2@-1892.59,1033.48 -1892.59,993.5 -1983.86,902.22 ; v1(-1965.77,1301.93) -1851.08,1187.24 ; C17.1@-1108.27,-117.62 -1054.63,-63.98 -769.29,-63.98 U38.12@-681.89,-151.38 ; pad.1@-912.4,2026.81 -927.22,2026.81 Buzz.1@-927.22,1915.94 -409.23,1915.94 -315.49,1822.2 -315.49,1555.85 ; -681.89,111.81 U38.4@-681.89,148.62 ; -500.37,-1340.37 -402.15,-1340.37 v1@-350.98,-1391.54 ; -380.73,1037.13 -380.73,1133.74 -353.48,1160.98 -322.58,1160.98 ; C2.2@-208.31,1550.24 R3.1@-102.52,1550.24 ; U39.6@-200.79,-2361.73 -180.79,-2341.73 U39.10@-91.54,-2341.73 ; v1(-195.47,-728.03) -34.68,-728.03 v1@-33.82,-727.17 ; v1@-189.33,-2154.98 -118.11,-2226.2 -118.11,-2315.16 U39.10@-91.54,-2341.73 ; -175.47,-1448.13 -175.47,-1357.16 -85.24,-1266.93 -55.12,-1266.93 6.97,-1204.84 6.97,-1014.13 3.64,-1010.8 3.64,-941.54 -18.86,-919.04 -18.86,-841.87 v1(-25.65,-835.08) ; -67.68,-1442.6 -60.6,-1449.68 U5.2@-60.6,-1537.91 ; v1(-26.52,-735.33) -13.25,-722.07 -13.25,-552.83 ; 63.58,-2353.7 66.73,-2353.7 70.12,-2350.31 U39.11@91.54,-2350.31 ; 120.79,-418.8 -13.25,-552.83 ; U39.9@200.79,-2361.73 102.95,-2361.73 U39.11@91.54,-2350.31 ; 456.89,-1501.36 546.06,-1590.53 548.11,-1590.53 548.6,-1591.02 595.3,-1591.02 626.38,-1559.94 v1(823.35,-1559.94) 865.28,-1559.94 958.09,-1467.13 ; 466.61,2236.93 R52.2@614.21,2236.93 614.21,2008.07 ; 526.65,1861.06 614.21,1948.62 614.21,2008.07 ; v1@568.37,-274.39 534.88,-307.87 299.72,-307.87 235.26,-243.41 45.43,-243.41 -11.5,-300.33 -11.5,-301.81 -86.17,-376.49 -86.17,-387.35 -106.46,-407.63 -106.46,-506.34 -99.96,-506.34 -53.46,-552.83 -13.25,-552.83 ; 876,1930.96 C5.2@942.48,1930.96 ; 913.92,2015.39 960.59,1968.72 C5.2@960.59,1927.97 1055.43,1833.13 1055.43,1773.27 v1@992.46,1710.3 ; 917.42,2015.39 739.94,2015.39 C6.1@698.31,1973.76 648.52,1973.76 614.21,2008.07 ; D8.1@1322.05,1024.41 1323.25,1024.41 1363.86,983.8 1400.27,983.8 ; v1@1406.47,990 1443.8,990 1450,983.8 1755.94,983.8 1834.17,1062.03 1964.49,1062.03 ; v1(1457.54,1417.85) 1457.54,1092.46 v1(1489.23,1060.77) ; 1896.06,855.12 1996.06,855.12 2006.08,865.14 C30.2@2006.08,1020.43 1964.49,1062.03 ; v1@1911.48,428.62 C12.2@2050.39,428.62 2254.02,428.62 2287.4,462.01 U27.GND@2287.4,541.93 ; v1@2033.03,1097.36 1997.7,1062.03 1964.49,1062.03 ; U39.10@-91.54,-2341.73 -91.54,-2386.2 -79.98,-2397.76 70.57,-2397.76 91.54,-2376.79 U39.11@91.54,-2350.31
  Top Layer w50: -1996.06,855.12 -1983.86,867.32 -1983.86,902.22 ; -1892.59,1101.38 -1892.59,1168 -1873.34,1187.24 -1851.08,1187.24 -1601.75,1187.24 -1494.11,1079.61 ; v1(-1371.52,957.01) -1155.39,957.01 -1110,1002.4 -1079.27,1002.4 -1079.27,1323.6 ; C3.2@-1146.2,1575.33 -1079.27,1575.33 C4.2@-985.57,1575.33 ; C4.2@-979.11,1579.9 -887.34,1579.9 ; -681.89,68.25 -681.89,111.81 ; U38.4@-681.89,148.62 U38.5@-581.89,148.62 -581.89,212.01 v1@-589.96,220.08 ; v1@-638.52,-218.07 -681.89,-174.7 U38.12@-681.89,-151.38 U38.13@-581.89,-151.38 ; LD5V.K@-628.27,-753.94 -624.07,-749.74 LD8V.K@-624.07,-615.81 ; C7.2@-421.57,-1474.27 -407.09,-1488.76 -343.61,-1488.76 ; C1.2@-387.54,1555.85 -315.49,1555.85 ; v1@-350.98,-1391.54 -343.61,-1398.91 -343.61,-1488.76 ; -322.58,1160.98 -322.58,1281.28 -315.49,1288.37 ; -312.34,1555.85 C2.2@-217.46,1555.85 ; C8.2@-214.14,-1486.8 -341.65,-1486.8 -343.61,-1488.76 ; D9.1@850,-1467.13 958.09,-1467.13 ; v1@1016.85,1024.41 D6.1@1164.57,1024.41
  Bottom Layer w12: -968.52,-1848.5 -1226.67,-1848.5 -1254.96,-1820.22 -1254.96,-1471.08 -1224.57,-1440.69 -1078.25,-1440.69 -1053.69,-1416.13 -1053.69,-1282.2 -1059.17,-1276.71 -1123.5,-1276.71 -1144.67,-1255.55 -1144.67,-1250.73 -1170.14,-1225.27 -1170.14,-1201.08 -1137.64,-1168.58 -1011.12,-1168.58 -963.03,-1120.49 -915.57,-1120.49 ; -968.52,-1542.72 -908.01,-1482.2 -870.26,-1482.2 U30.GND@-865.02,-1476.97 ; R49.1@-965.22,435.32 -851.3,435.32 -843.08,443.53 -828.75,443.53 -737.94,534.35 -736.73,534.35 ; -896.69,-1388.15 -896.69,-1445.3 U30.GND@-865.02,-1476.97 ; v1(-784.82,-1477.26) -864.72,-1477.26 U30.GND@-865.02,-1476.97 ; v1(-230.47,317.28) -3.46,317.28 11.05,302.78 299.13,302.78 v1@306.95,294.96 ; MicroController1.32@-129.71,748.89 192.18,748.89 270.92,670.15 MicroController1.98@464.77,670.15 MicroController1.99@464.77,650.46 513.85,650.46 517.36,646.96 546.63,646.96 708.23,485.35 1039.33,485.35 1089.25,435.44 1402.96,435.44 1600.81,633.29 1600.81,905.16 1625.18,929.53 1945.75,929.53 2111.73,1095.51 ; v1@-89.37,1617.66 122.15,1617.66 ; -25.65,-774.74 -5.16,-754.25 190.46,-754.25 C24.1@232.87,-711.84 ; MicroController1.62@147.84,1164.24 147.84,1591.96 122.15,1617.66 ; MicroController1.11@206.9,569.75 206.9,532.33 218.51,520.72 267.57,520.72 339.93,448.37 375.28,448.37 v1(390.96,432.68) ; v1(226.3,1669.53) 174.43,1617.66 122.15,1617.66 ; R27.2@420.47,-1695.65 479.75,-1695.65 v1@482.98,-1698.88 ; U40.3@455.03,-517.51 455.03,-376.46 537.94,-293.56 544.31,-293.56 555.72,-282.14 555.72,-275.78 v1@587.86,-243.64 ; MicroController1.81@464.77,1004.79 609.94,1004.79 C26.2@653.22,1048.08 695.91,1005.39 997.83,1005.39 v1(1016.5,1024.06) ; U31.GND@497.46,-1488.64 497.46,-1452.03 540.39,-1409.09 651,-1409.09 695.91,-1454 695.91,-1477.15 732.32,-1513.56 ; 503.17,-1782.97 516.54,-1782.97 565.47,-1831.91 565.47,-1891.36 527.76,-1929.07 527.76,-2084.45 610.98,-2167.68 735.53,-2167.68 775.62,-2127.59 775.62,-2036.89 775.62,-1993.38 ; 593.12,-243.64 622.74,-214.03 622.74,-147.65 611.15,-136.06 611.15,-125.22 609.9,-123.98 609.9,-69.63 689.57,10.04 839.17,10.04 1032.76,-183.54 1052.99,-183.54 1135.71,-100.83
  Bottom Layer w20: v1(-846.14,1650.79) -803.43,1650.79 v1@-686.91,1534.27 ; v1(-656.16,-220.06) -703.25,-220.06 -734.41,-188.9 -734.41,-121.02 -735.14,-120.3 -733.82,-2.43 -717.02,-2.43 -632.48,82.11 -632.48,179.94 -593.52,218.9 v1(-593.52,229.57) ; v1@-360.14,-1382.74 v1(-360.14,-1191.06) ; R28.2@-315.21,-1762.43 -216.83,-1860.81 ; -216.83,-2011.79 -216.83,-1860.81 ; v1(-172.72,-1805.2) -216.83,-1849.31 -216.83,-1860.81 ; v1(-26.52,-735.33) -25.65,-736.2 -25.65,-774.74 v1(-25.65,-835.08) ; 1512.44,1460.07 1512.44,1514.62 1518.42,1514.62 1575.54,1571.74 1575.54,1613.14 1554.21,1634.47
  Bottom Layer w25: P1.6@-1622.2,1668.82 P1.8@-1551.49,1739.54 ; v1(-1474.51,1058.98) -1372.54,957.01 v1(-1371.52,957.01) ; -970.67,-1875.81 -970.67,-2068.25 -901.38,-2137.54 -809.13,-2137.54 -731.79,-2060.2 ; -968.52,-1873.66 -968.52,-1848.5 C10.2@-968.52,-1703.03 -968.52,-1542.72 ; C27.2@-862,534.35 -737.94,534.35 ; -736.73,534.35 C28.2@-527.69,534.35 ; v1@-437.21,-727.65 -432.82,-732.05 -279.8,-732.05 -279.8,-722.44 ; U26.2@-316.52,-1928.88 R32.1@-316.52,-1848.45 R28.2@-316.52,-1763.73 ; -216.83,-2011.79 -216.83,-2053.59 -194.59,-2075.84 v1(-194.59,-2150.77) ; U39.7@-200.79,-2515.98 U39.7@-200.79,-2507.4 U39.6@-200.79,-2361.73 ; v1@-198.48,-722.44 -279.8,-722.44 ; C13.2@-166.5,-430.18 -166.5,-590.53 -234.29,-658.33 U29.GND@-279.8,-658.33 -279.8,-722.44 ; v1@-8.15,-1111.14 24.84,-1078.15 175.73,-1078.15 270.28,-1172.7 473.21,-1172.7 v1(502.38,-1201.87) ; U39.8@200.79,-2507.4 U39.9@200.79,-2361.73 ; C24.1@232.87,-711.84 246.1,-698.61 U40.28@336.92,-698.61 ; v1(237.54,207.05) 184.54,154.05 C22.2@184.54,132.33 C21.2@184.54,-235.55 184.54,-267.97 225.11,-308.55 ; C23.1@247.24,-479.93 247.24,-330.68 225.11,-308.55 ; v1(291.69,-300.67) 283.82,-308.55 225.11,-308.55 ; U25.2@477.07,-1870.73 476.56,-1870.23 476.56,-1795.9 R31.1@482.98,-1789.48 v1@482.98,-1698.88 ; C9.2@726.95,-1539.17 802.58,-1539.17 v1(823.35,-1559.94) 823.35,-1688.86 v1(811.32,-1700.89) ; C20.2@857.99,1655.63 876.41,1637.21 R39.2@935.47,1637.21 ; v1(986.73,1709.59) 986.73,1673.43 R39.2@944.68,1631.38 1423.07,1631.38 1440.93,1649.23 1548.21,1756.51 ; 1135.71,-100.83 1214.48,-179.61 1214.48,-668.7 1179.01,-704.18 1155.96,-704.18 ; v1@1410.2,1018.25 1452.72,1060.77 v1(1489.23,1060.77) ; v1@1464.78,1412.42 1512.44,1460.07 ; 1554.21,1634.47 1554.21,1758.8 ; v1@1919.61,422.38 2248.64,422.38 2326.36,500.1 2326.36,791.64 2220.2,897.81 2220.2,1043.24 2193.85,1069.59 2192.04,1069.59 2166.11,1095.51 2111.73,1095.51 v1(2044.29,1095.51)
  Bottom Layer w50: v1(-1965.77,1301.93) -1877.72,1389.98 -1877.72,1531.77 -1802.66,1606.83 -1728.52,1606.83 -1719.81,1598.11 P1.4@-1692.91,1598.11 P1.6@-1622.2,1668.82
  other v1: -363.96,-1373.17 4.23,-1105.85 581.15,-266.82 306.28,271.83 1911.16,428.94 1415.81,1008.39
MISO: "ICSP uC1.1" MicroController1.22 | length 1487.1
  Bottom Layer w10: MicroController1.22@-9.64,569.75 -9.64,349.6 18.7,321.26 246.54,321.26 249.63,324.35 254.31,324.35 257.4,321.26 317.41,321.26 320.5,324.35 344.57,324.35 345.65,323.28 518.09,323.28 519.17,324.35 529.12,324.35 532.98,320.49 557.75,320.49 558.45,319.79 688.58,319.79 693.14,324.35 859.02,324.35 866.75,316.61 904.02,316.61 917.19,303.44 963.82,303.44 1071.28,195.98 1071.28,132.87 1037.57,99.17 1035.71,99.17
"MISO 16": "ICSP 1.1" U40.17 | length 711.7
  Top Layer w25: v1(965.93,-522.28) 965.93,-726.73 v1(968.9,-729.7)
  Bottom Layer w20: v1(965.93,-522.28) 984.03,-504.18 1055.96,-504.18
  Bottom Layer w25: U40.17@612.51,-848.21 850.39,-848.21 v1(968.9,-729.7)
MOSI: "ICSP uC1.4" MicroController1.21 | length 1603.1
  Bottom Layer w10: MicroController1.21@10.05,569.75 10.05,355.9 27.2,338.74 239.3,338.74 242.39,341.83 261.55,341.83 264.64,338.74 310.17,338.74 313.26,341.83 351.82,341.83 352.89,340.76 429.04,340.76 430.11,341.83 435.12,341.83 435.45,341.5 511.6,341.5 511.92,341.83 536.36,341.83 540.22,337.97 564.99,337.97 565.7,337.27 681.34,337.27 685.9,341.83 866.26,341.83 873.99,334.09 911.26,334.09 921.14,324.21 968.7,324.21 1093.46,199.45 1093.46,97.08 1077.56,81.17 1077.56,57.32 1135.71,-0.83
"MOSI 16": "ICSP 1.4" U40.16 | length 566.6
  Bottom Layer w12: U40.16@667.63,-793.1 844.62,-793.1 989.7,-648.01 1112.13,-648.01 1155.96,-604.18